# Altium PCB BUS.PcbDoc
Units mm, origin at the board's own origin, x right, y up, seen from the top; angles counter-clockwise.
Board outline 86 x 48 mm, 2 copper layers (Top Layer, Bottom Layer); 12 components, 10 nets, 60 pads, 24 vias.
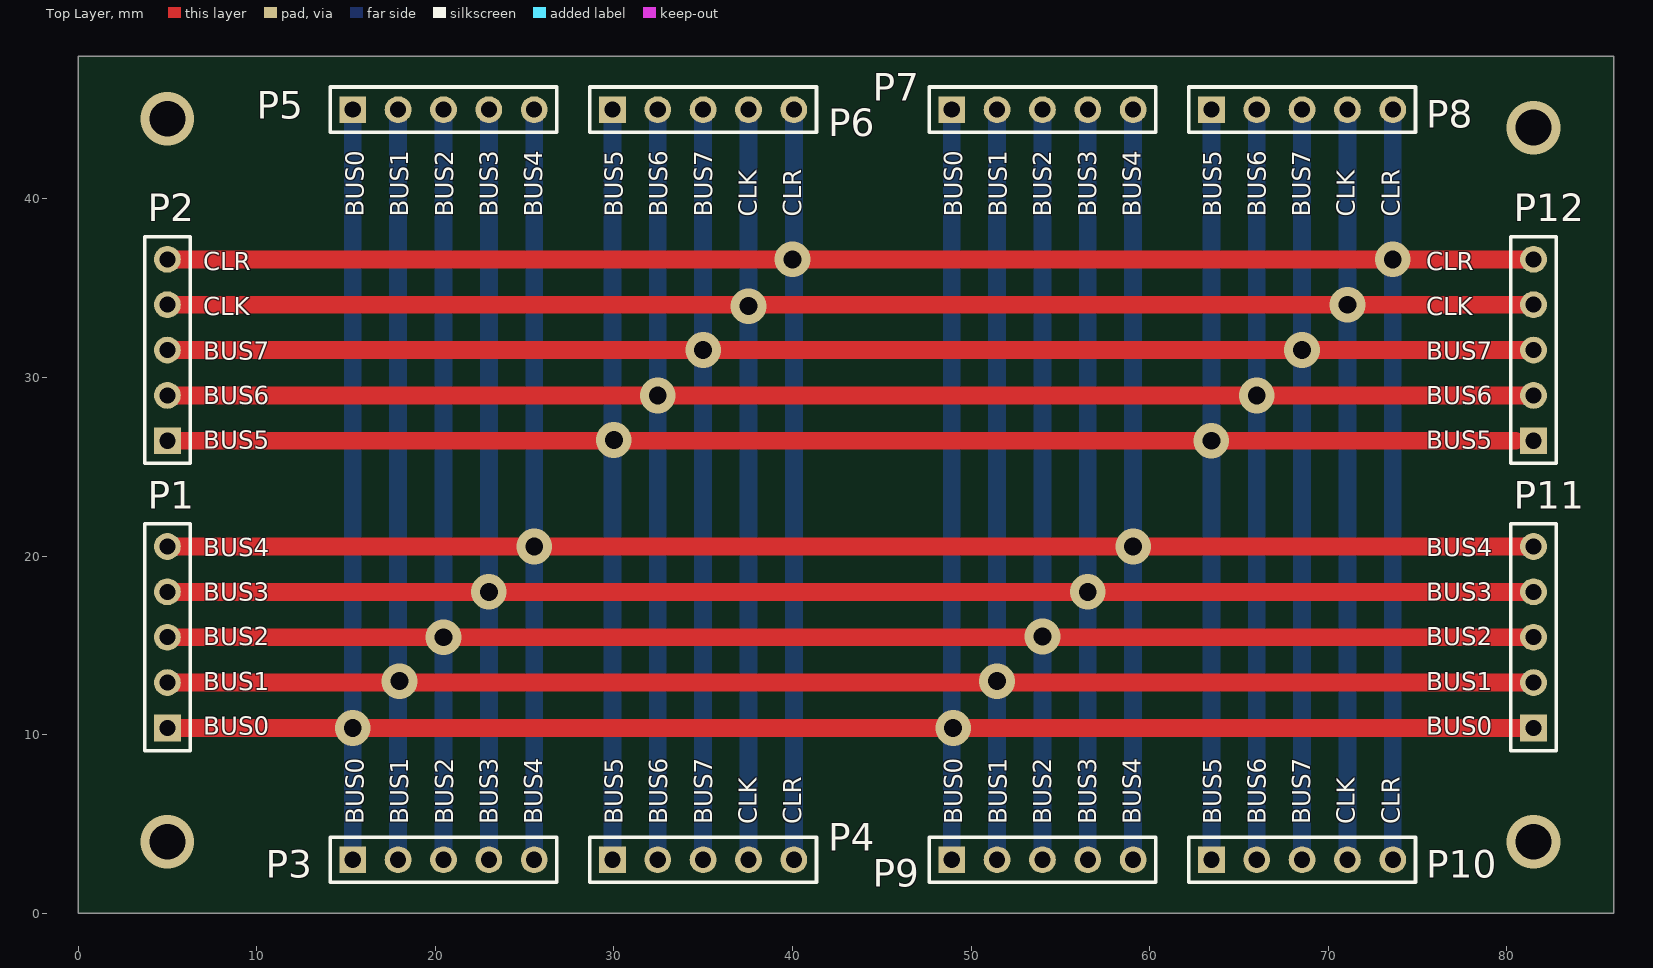
[diagram p0: Top Layer view]
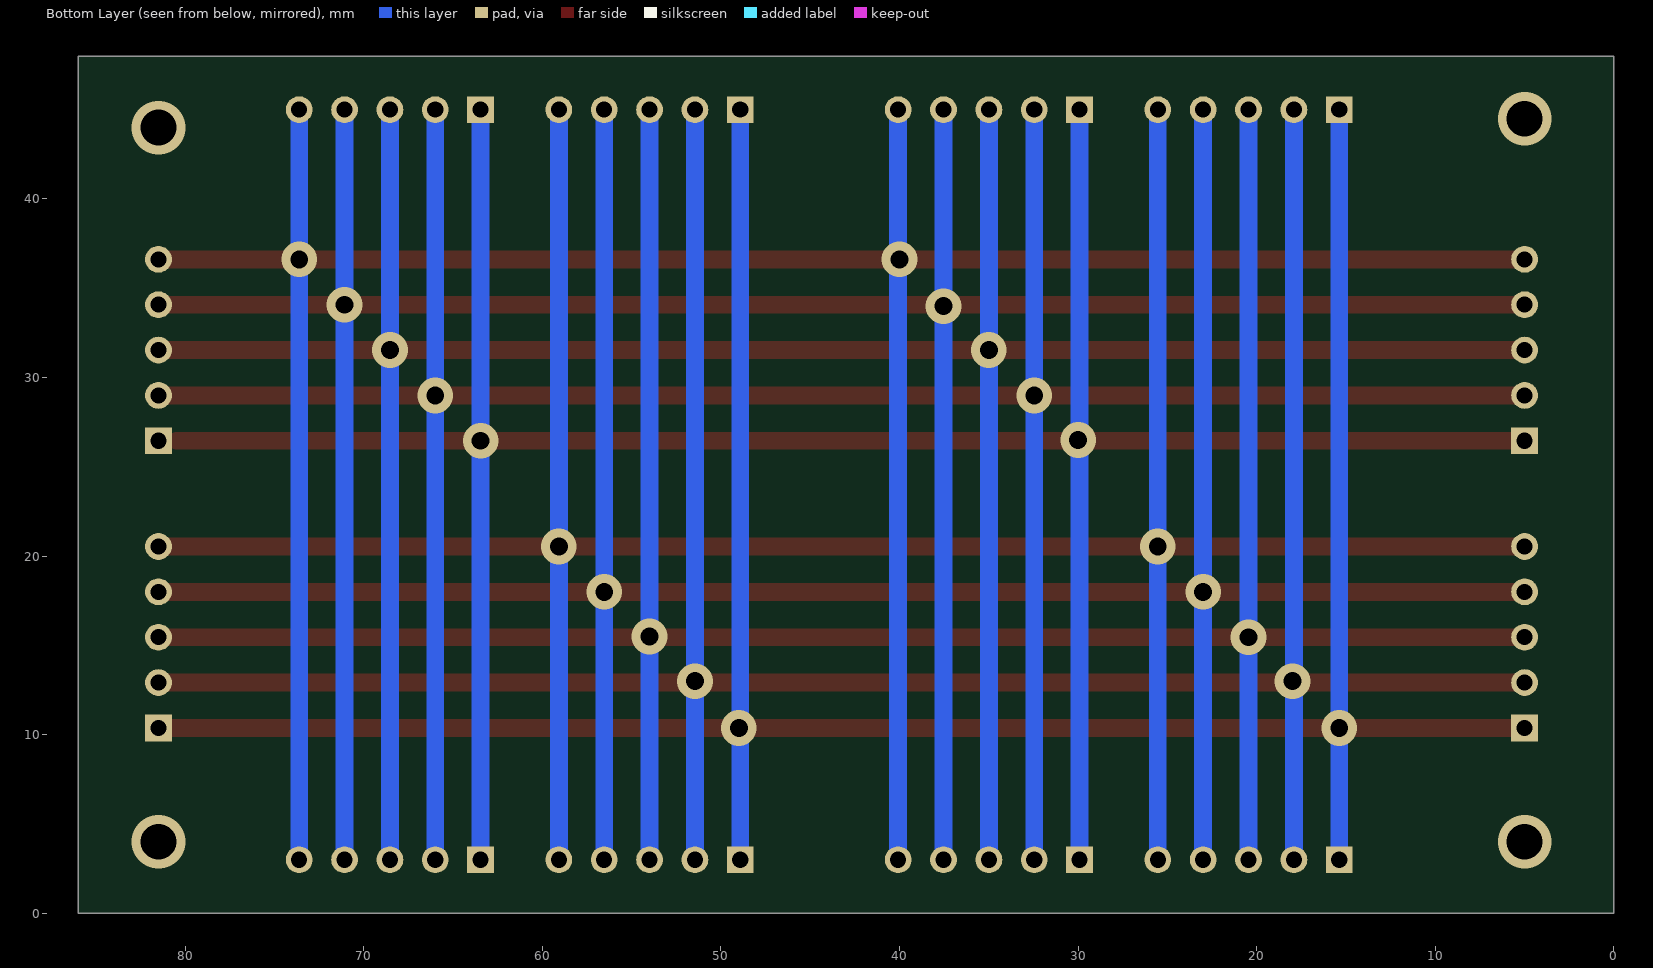
[diagram p1: Bottom Layer view, seen from below]

## Layer stack, top to bottom
Top Solder: solder mask 0.0102, Solder Resist, Dk 3.5
Top Layer: signal copper 0.0356
Dielectric 1: dielectric 0.32, FR-4, Dk 4.8
Bottom Layer: signal copper 0.0356
Bottom Solder: solder mask 0.0102, Solder Resist, Dk 3.5

## Board outline
0,0 86,0 86,48 0,48

## Design rules (kind name [scope] priority, off if disabled: settings)
Clearance [All] p1: gap=0.254 ignorepadtopadclearanceinfootprint=FALSE except(0: Arc-Hole Track-Hole SMDPad-Hole THPad-Hole Via-Hole Fill-Hole Poly-Hole Region-Hole Text-Hole)
PolygonConnect [All] p1: connectstyle=Relief reliefconductorwidth=0.254 reliefentries=4 polygonreliefangle="90 Angle" airgapwidth=0.254
RoutingVias [All] p1: holewidth=0.711 width=1.27 viastyle="Through Hole" minholewidth=0.711 minwidth=1.27 maxholewidth=2 maxwidth=3
SolderMaskExpansion [All] p1: expansion=0.102
Width [All] p1: maxlimit=1 minlimit=0.254 preferedwidth=1 minimp=50.000000 maximp=50.000000 favimp=50.000000
30 further rules are at their usual default settings.

## Components (designator, comment, footprint, x,y, rotation, side; value= is the part's Value field where it differs from the comment)
P1 "Header 5" HDR1X5 5,10.38 r90 top
P2 "Header 5" HDR1X5 5,26.46 r90 top
P3 "Header 5" HDR1X5 15.38,3 r0 top
P4 "Header 5" HDR1X5 29.92,3 r0 top
P5 "Header 5" HDR1X5 15.38,45 r0 top
P6 "Header 5" HDR1X5 29.92,45 r0 top
P7 "Header 5" HDR1X5 48.92,45 r0 top
P8 "Header 5" HDR1X5 63.46,45 r0 top
P9 "Header 5" HDR1X5 48.92,3 r0 top
P10 "Header 5" HDR1X5 63.46,3 r0 top
P11 "Header 5" HDR1X5 81.5,10.38 r90 top
P12 "Header 5" HDR1X5 81.5,26.46 r90 top

## Footprints (in the part's own frame and the unit in brackets; to place one, negate y for a bottom-side part, rotate by r counter-clockwise, add the part's x,y. Pads: shape width x height; smd on the part's side, far side on the other; paste and mask are expansions set on the pad)
HDR1X5 [mm] "Connector; Header; 5 Position"
  rect 1.5x1.5 hole 0.9: 1(0,0)
  round 1.5 hole 0.9: 2(2.54,0) 3(5.08,0) 4(7.62,0) 5(10.16,0)
  silkscreen extent -1.27,-1.27 11.43,1.27

## Part data
P1 P2 P3 P4 P5 P6 P7 P8 P9 P10 P11 P12: "Header, 5-Pin", LatestRevisionDate=17-Jul-2002, LatestRevisionNote="Re-released for DXP Platform.", Publisher="Altium Limited"

## Via types
v1: diameter 2, hole 1, Top Layer to Bottom Layer, 20 vias
v2: diameter 3, hole 2, Top Layer to Bottom Layer, 4 vias

## Nets (pads, with @x,y where several pads share a name; then routed paths per layer and width w, separated by ;. In a path a pad name is that pad's centre, name@x,y a point inside that pad or via, vN(x,y) a via of type N, cw(c..) or ccw(c..) an arc to the next point about the centre after c; other vN are vias at no path point)
NetP1_1: P1.1 P3.1 P5.1 P7.1 P9.1 P11.1 | length 160.4
  Top Layer w1: P1.1 v1(15.38,10.38) ; v1@15.5,10.38 v1(49,10.38) P11.1
  Bottom Layer w1: P3.1 v1(15.38,10.38) P5.1 ; P9.1 P7.1
NetP1_2: P1.2 P3.2 P5.2 P7.2 P9.2 P11.2 | length 160.5
  Top Layer w1: P1.2 18,12.92 51.46,12.92 P11.2
  Bottom Layer w1: P3.2 P5.2 ; P9.2 v1(51.46,13) P7.2
  other v1: 18,13
NetP1_3: P1.3 P3.3 P5.3 P7.3 P9.3 P11.3 | length 160.5
  Top Layer w1: P1.3 v1(20.46,15.46) ; v1@20.5,15.46 54,15.46 P11.3
  Bottom Layer w1: P3.3 v1(20.46,15.46) P5.3 ; P9.3 v1(54,15.5) P7.3
NetP1_4: P1.4 P3.4 P5.4 P7.4 P9.4 P11.4 | length 160
  Top Layer w1: P1.4 v1(56.54,18) ; v1@57,18 P11.4
  Bottom Layer w1: P3.4 v1(23,18) P5.4 ; P9.4 v1(56.54,18) P7.4
NetP1_5: P1.5 P3.5 P5.5 P7.5 P9.5 P11.5 | length 161.1
  Top Layer w1: P1.5 v1(25.54,20.54) v1(59.08,20.54) ; v1@58.5,20.54 v1(59.08,20.54) ; P11.5 v1(59.08,20.54)
  Bottom Layer w1: P3.5 v1(25.54,20.54) P5.5 ; P9.5 v1(59.08,20.54) P7.5
NetP2_1: P2.1 P4.1 P6.1 P8.1 P10.1 P12.1 | length 158.5
  Top Layer w1: P2.1 v1(63.46,26.46) ; v1@63.96,26.46 80.5,26.46
  Bottom Layer w1: P4.1 P6.1 ; P10.1 v1(63.46,26.46) P8.1@63.46,44.54
  other v1: 30,26.5
NetP2_2: P2.2 P4.2 P6.2 P8.2 P10.2 P12.2 | length 160
  Top Layer w1: P2.2@5.5,29 v1(32.46,29) v1(66,29) P12.2
  Bottom Layer w1: P4.2 v1(32.46,29) P6.2 ; P10.2 v1(66,29) P8.2
NetP2_3: P2.3 P4.3 P6.3 P8.3 P10.3 P12.3 | length 160
  Top Layer w1: P2.3 v1(35,31.54) v1(68.54,31.54) ; v1@69,31.54 P12.3
  Bottom Layer w1: P4.3 v1(35,31.54) P6.3 ; P10.3 v1(68.54,31.54) P8.3
NetP2_4: P2.4 P4.4 P6.4 P8.4 P10.4 P12.4 | length 160.5
  Top Layer w1: P2.4 71,34.08 v1(71.08,34.08) P12.4
  Bottom Layer w1: P4.4 v1(37.54,34) P6.4 ; P10.4 v1(71.08,34.08) P8.4
NetP2_5: P2.5 P4.5 P6.5 P8.5 P10.5 P12.5 | length 159.7
  Top Layer w1: P2.5 v1(40,36.62) v1(73.62,36.62) ; v1@74,36.62 P12.5
  Bottom Layer w1: P4.5 P6.5 ; P10.5 v1(73.62,36.62) P8.5@73.62,44.62
copper on no net:
  other v2: 5,4 81.5,4 81.5,44 5,44.5

## Silkscreen, mask and mechanical layers (free items; w line width, h text height)
Top Overlay:
  text "BUS0" at 16,39 h1 r90
  text "BUS1" at 18.5,39 h1 r90
  text "BUS2" at 21,39 h1 r90
  text "BUS3" at 23.5,39 h1 r90
  text "BUS4" at 26,39 h1 r90
  text "BUS5" at 30.5,39 h1 r90
  text "BUS6" at 33,39 h1 r90
  text "BUS7" at 35.5,39 h1 r90
  text "CLK" at 38,39 h1 r90
  text "CLR" at 40.5,39 h1 r90
  text "BUS0" at 49.5,39 h1 r90
  text "BUS1" at 52,39 h1 r90
  text "BUS2" at 54.5,39 h1 r90
  text "BUS3" at 57,39 h1 r90
  text "BUS4" at 59.5,39 h1 r90
  text "BUS5" at 64,39 h1 r90
  text "BUS6" at 66.5,39 h1 r90
  text "BUS7" at 69,39 h1 r90
  text "CLK" at 71.5,39 h1 r90
  text "CLR" at 74,39 h1 r90
  text "CLR" at 7,36 h1
  text "CLR" at 75.5,36 h1
  text "CLK" at 7,33.5 h1
  text "CLK" at 75.5,33.5 h1
  text "BUS7" at 7,31 h1
  text "BUS7" at 75.5,31 h1
  text "BUS6" at 7,28.5 h1
  text "BUS6" at 75.5,28.5 h1
  text "BUS5" at 7,26 h1
  text "BUS5" at 75.5,26 h1
  text "BUS4" at 7,20 h1
  text "BUS4" at 75.5,20 h1
  text "BUS3" at 7,17.5 h1
  text "BUS3" at 75.5,17.5 h1
  text "BUS2" at 7,15 h1
  text "BUS2" at 75.5,15 h1
  text "BUS1" at 7,12.5 h1
  text "BUS1" at 75.5,12.5 h1
  text "BUS0" at 7,10 h1
  text "BUS0" at 75.5,10 h1
  text "BUS0" at 16,5 h1 r90
  text "BUS1" at 18.5,5 h1 r90
  text "BUS2" at 21,5 h1 r90
  text "BUS3" at 23.5,5 h1 r90
  text "BUS4" at 26,5 h1 r90
  text "BUS5" at 30.5,5 h1 r90
  text "BUS6" at 33,5 h1 r90
  text "BUS7" at 35.5,5 h1 r90
  text "CLK" at 38,5 h1 r90
  text "CLR" at 40.5,5 h1 r90
  text "BUS0" at 49.5,5 h1 r90
  text "BUS1" at 52,5 h1 r90
  text "BUS2" at 54.5,5 h1 r90
  text "BUS3" at 57,5 h1 r90
  text "BUS4" at 59.5,5 h1 r90
  text "BUS5" at 64,5 h1 r90
  text "BUS6" at 66.5,5 h1 r90
  text "BUS7" at 69,5 h1 r90
  text "CLK" at 71.5,5 h1 r90
  text "CLR" at 74,5 h1 r90
BoardOutline:
  lines w0.1: 0,0.5 0,47.5 0.5,48 1.5,48 85.5,48 86,47.5 86,0.5 85.5,0 0.5,0 0,0.5